# Altium PCB Mynd_USB_JACK.PcbDoc
Units mm, origin at the board's own origin, x right, y up, seen from the top; angles counter-clockwise.
Board outline 23 x 20.8 mm, 2 copper layers (Component Side, Solder Side), stack 1.58 mm thick; 39 components, 14 nets, 106 pads, 130 vias.
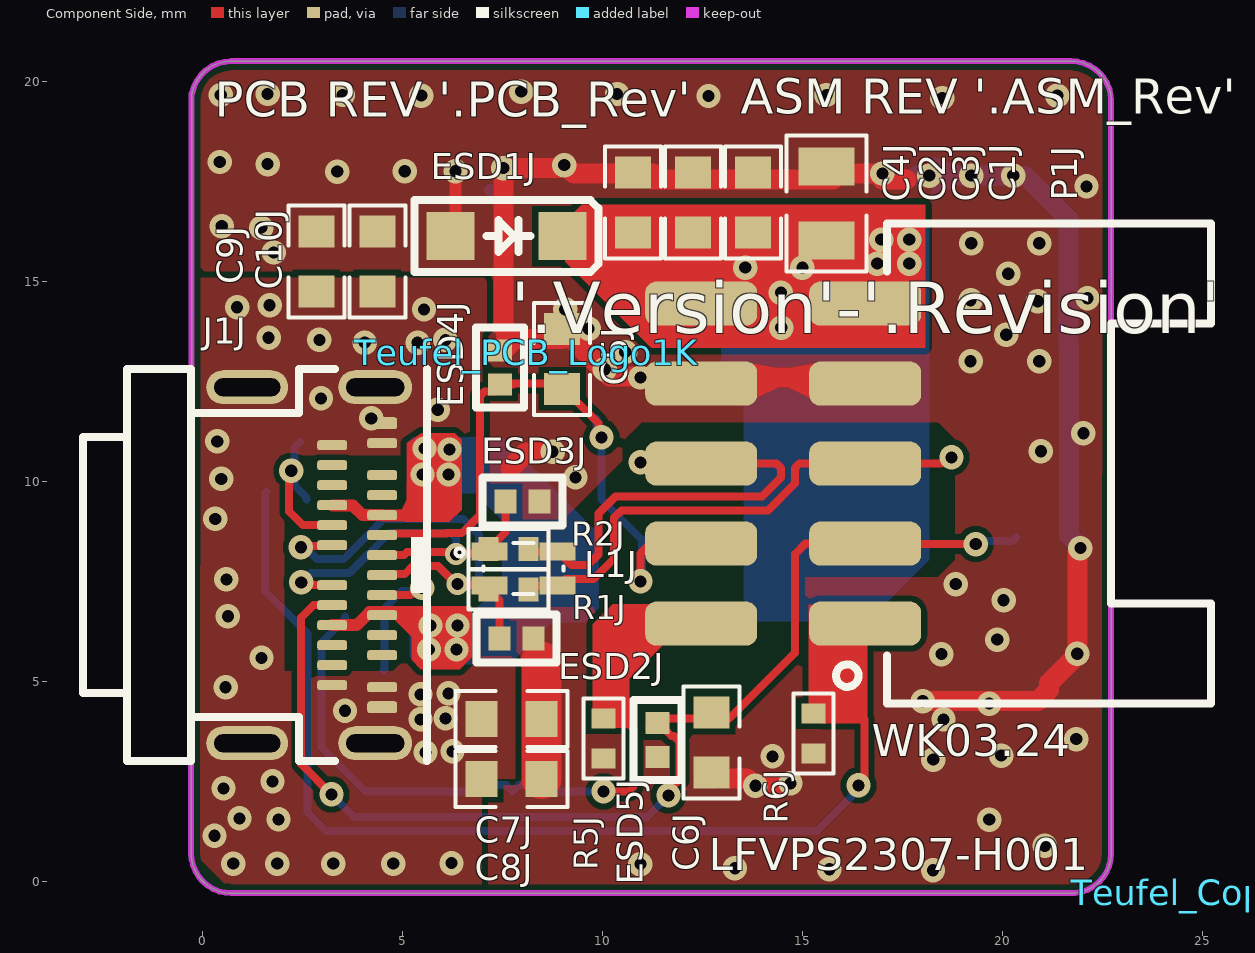
[diagram p0: Component Side view]
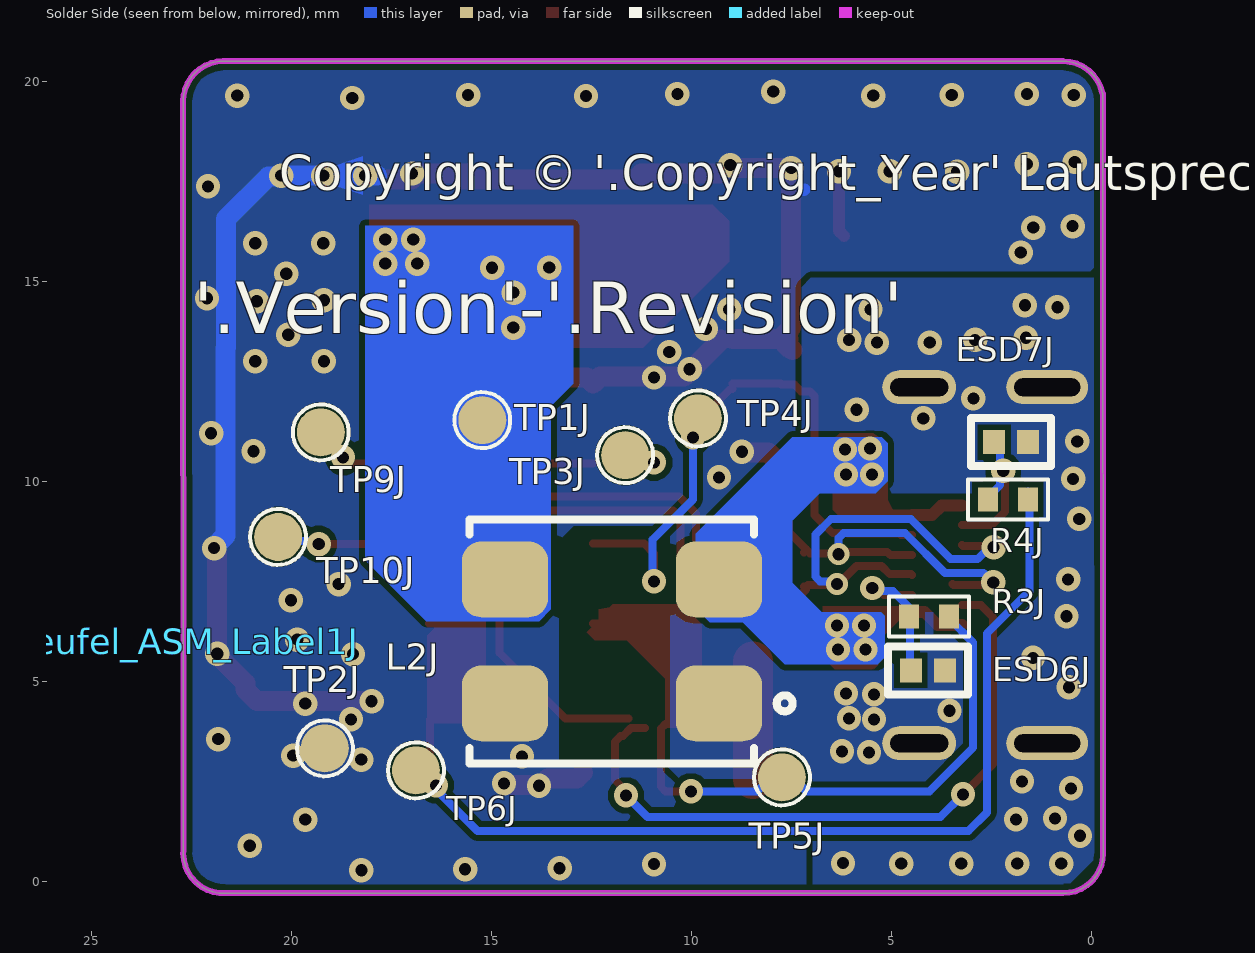
[diagram p1: Solder Side view, seen from below]
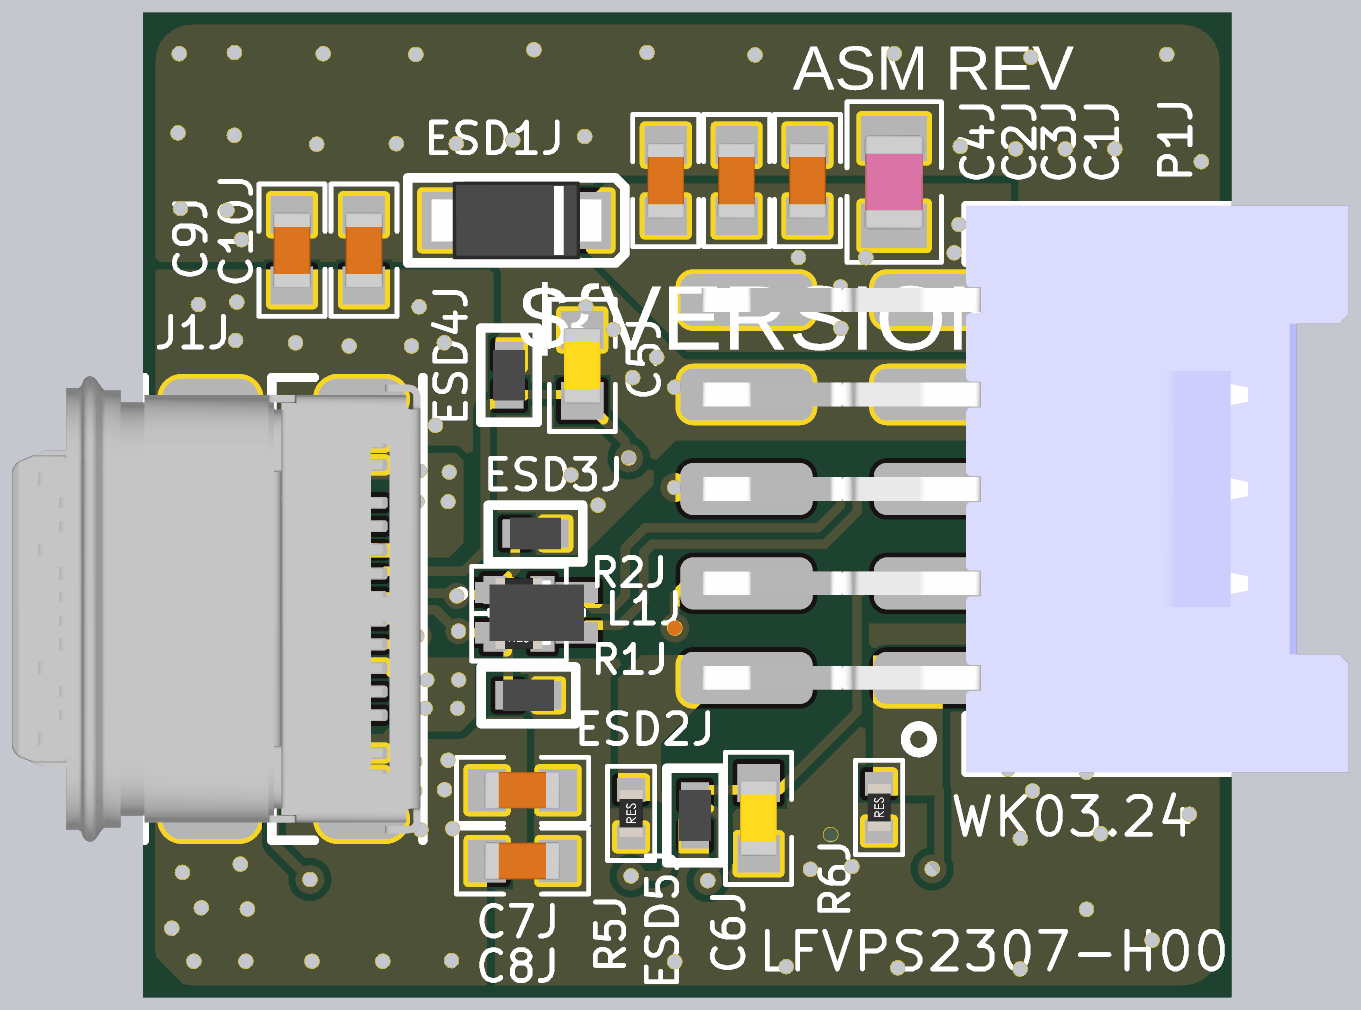
[diagram p2: 3D render of the assembled board from above, using the file's embedded part models]
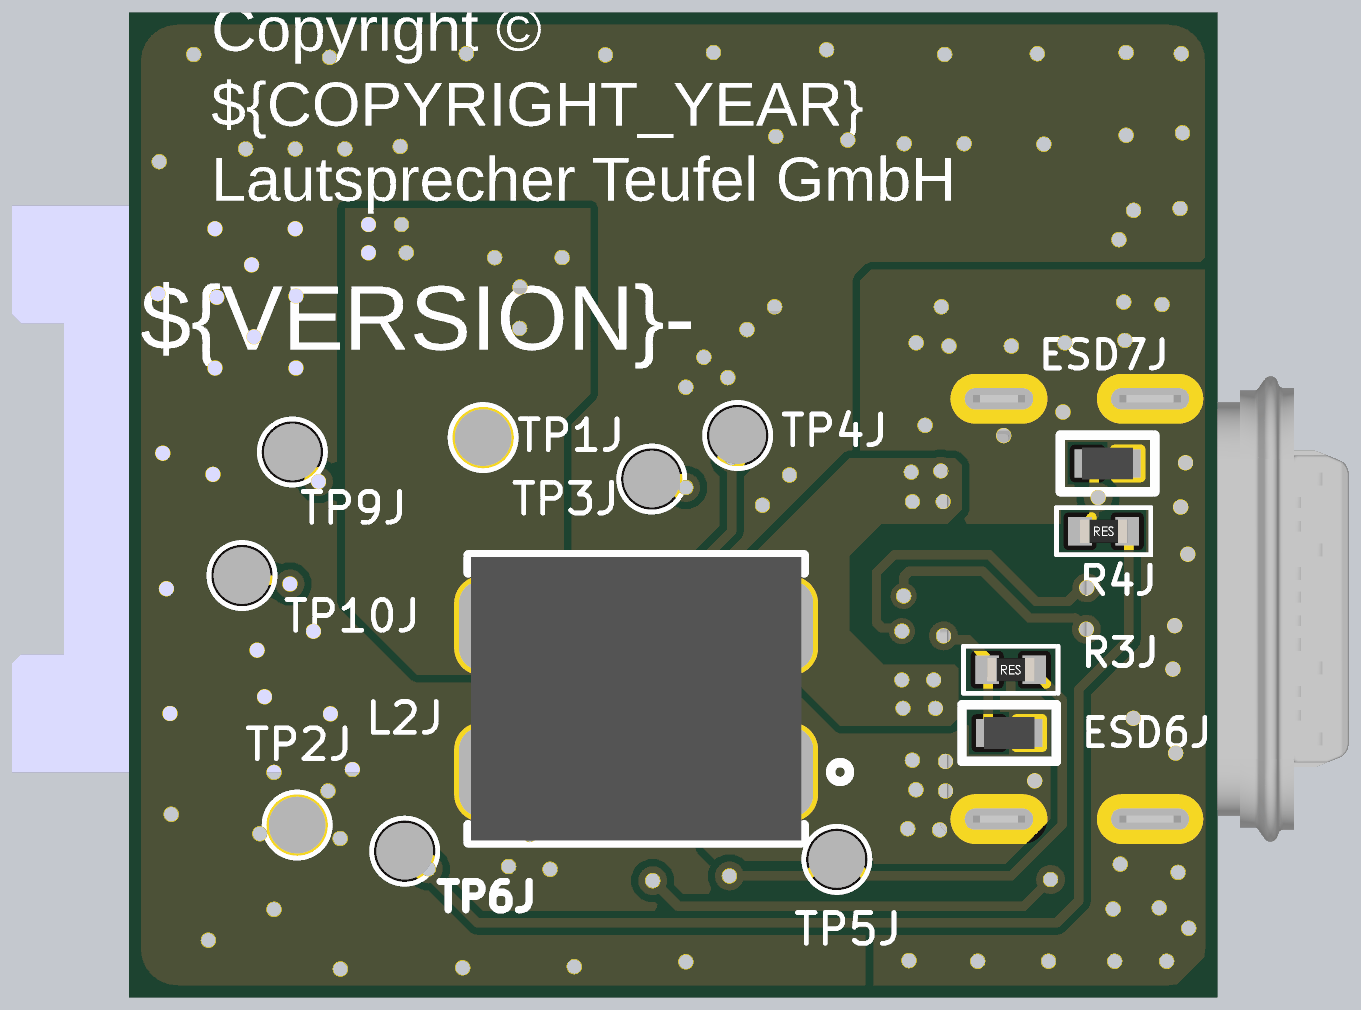
[diagram p3: 3D render of the assembled board from below, using the file's embedded part models]

## Layer stack, top to bottom
Top Solder: solder mask 0.0102, Solder Resist, Dk 3.5
Component Side: signal copper 0.035
Dielectric1: core 1.5097, FR-4, Dk 4.2
Solder Side: signal copper 0.035
Bottom Solder: solder mask 0.0102, Solder Resist, Dk 3.5

## Board outline
-0.282,0.704 -0.271,19.694 -0.264,19.694 cw(c0.718,19.504) 0.718,20.504 21.718,20.504 cw(c21.718,19.504) 22.718,19.504 22.715,0.752 22.718,0.704 cw(c21.718,0.704) 21.809,-0.292 21.791,-0.296 0.718,-0.296 cw(c0.718,0.704)

## Design rules (kind name [scope] priority, off if disabled: settings)
AssemblyTestPointUsage [HasFootprint('PAD-NDK-06')] p1:
AssemblyTestpoint [HasFootprint('PAD-NDK-06')] p1: testpointundercomponent=TRUE minsize=1.016 maxsize=2.54 preferedsize=1.524 minholesize=0 maxholesize=1.016 preferedholesize=0.813 testpointgrid=0.025 usegrid=TRUE gridtolerance=0 allowsidetop=TRUE allowsidebottom=TRUE
Clearance [All] p1: gap=0.15 ignorepadtopadclearanceinfootprint=FALSE
Clearance Clearance_Poly [InPolygon] p2 off: gap=0.25 ignorepadtopadclearanceinfootprint=FALSE // Protel DXP Scope 1 Expression Was: InPolygon
ComponentClearance ComponentClearance_Termofühler [HasFootprint('SOP65P1420X360_HS-44N') vs HasFootprint('TO-92_MCP9700')] p1 off: gap=0 collisioncheckmode=3 verticalgap=0.254 showdistances=FALSE
ComponentClearance ComponentClearance_Testpoint [InComponent('TP*')] p2 off: gap=0 collisioncheckmode=3 verticalgap=0.254 showdistances=FALSE
ComponentClearance ComponentClearance_MC16 [OnLayer('Component Side')] p3 off: gap=0 collisioncheckmode=3 verticalgap=0.254 showdistances=FALSE
ComponentClearance ComponentClearance_1 [All] p4 off: gap=0.2 collisioncheckmode=3 verticalgap=0.254 showdistances=FALSE
ComponentClearance ComponentClearance_Stiftleiste [HasFootprint('1X04RM254') vs HasFootprint('1X02RM254')] p5 off: gap=0 collisioncheckmode=3 verticalgap=0.254 showdistances=FALSE
DiffPairsRouting [All] p1 off: maxlimit=0.254 minlimit=0.254 mostfreqgap=0.254 toplayer_minwidth=0.381 toplayer_maxwidth=0.381 toplayer_prefwidth=0.381 bottomlayer_minwidth=0.381 bottomlayer_maxwidth=0.381 bottomlayer_prefwidth=0.381 maxuncoupledlength=12.7 // Protel DXP Scope 1 Expression Was: InDifferentialPairClass('USB_HS_LINES')
FabricationTestpoint [All] p1: side=3 testpointundercomponent=TRUE minsize=0.5 maxsize=2.54 preferedsize=1.524 minholesize=0 maxholesize=1.016 preferedholesize=0.813 testpointgrid=0.025 allowsidetop=TRUE allowsidebottom=TRUE usegrid=TRUE gridtolerance=0
FanoutControl Fanout_LCC [All] p1 off: bgadir=Out bgaviamode=Centered fanoutstyle=Auto fanoutdirection=Alternating viagrid=0.025 // Protel DXP Scope 1 Expression Was: IsLCC   Fanout_LCC (Default Rule)
FanoutControl Fanout_BGA [All] p2 off: bgadir=Out bgaviamode=Centered fanoutstyle=Auto fanoutdirection=Alternating viagrid=0.025 // Protel DXP Scope 1 Expression Was: IsBGA   Fanout_BGA (Default Rule)
FanoutControl Fanout_SOIC [All] p3 off: bgadir=Out bgaviamode=Centered fanoutstyle=Auto fanoutdirection=Alternating viagrid=0.025 // Protel DXP Scope 1 Expression Was: IsSOIC   Fanout_SOIC (Default Rule)
FanoutControl Fanout_Default [All] p4: bgadir=Out bgaviamode=Centered fanoutstyle=Auto fanoutdirection=Alternating viagrid=0.025 // Fanout_Default (Default Rule)
FanoutControl Fanout_Small [All] p5 off: bgadir=Out bgaviamode=Centered fanoutstyle=Auto fanoutdirection=Alternating viagrid=0.025 // Protel DXP Scope 1 Expression Was: (CompPinCount < 5)   Fanout_Small (Default Rule)
Height [All] p1 off: minheight=0 maxheight=25.4 prefheight=12.7
HoleSize [All] p1: absolutevalues=TRUE maxlimit=8 minlimit=0.25 maxpercent=80.000 minpercent=20.000
PlaneClearance [All] p1: clearance=0.3
PlaneConnect [All] p1: planeconnectstyle=Relief reliefexpansion=0.508 reliefentries=4 reliefconductorwidth=0.5 reliefairgap=0.254
PolygonConnect [All] p1: connectstyle=Direct reliefconductorwidth=0.5 reliefentries=4 polygonreliefangle="45 Angle" airgapwidth=0.254
PolygonConnect PolygonConnect_direct_stepup [All] p2 off: connectstyle=Direct reliefconductorwidth=0.254 reliefentries=4 polygonreliefangle="90 Angle" airgapwidth=0.254 // Protel DXP Scope 1 Expression Was: (InNet('NETC548_1') AND IsNamedPolygon('BOT_STEPUP_L502OUT')) OR (InNet('NetL502_1') AND IsNamedPolygon('BOT_STEPUP_L502IN')) OR     (InNet('NetC504_2') AND IsNamedPolygon('BOT_STEPUP_IN')) OR   (InNet('24V') AND IsNamedPolygon('BOT_STEPUP_24VOUT')) OR (InNet('GND') AND (IsNamedPolygon('BOT_STEPUP_GND') OR                     IsNamedPolygon('BOT_GLOBAL_GND') OR                                    IsNamedPolygon('TOP_GLOBAL_GND')                   ) )
PolygonConnect PolygonConnect_VIA [All] p3 off: connectstyle=Direct reliefconductorwidth=0.2 reliefentries=4 polygonreliefangle="90 Angle" airgapwidth=0.254 // Protel DXP Scope 1 Expression Was: isVia  or HasFootprint('HOLE_3.2_6.0') or  HasFootprint('CAPPR750W80D1600H2500') or HasFootprint('JST_B6P-VH-FB-B') or HasFootprint('JST_B2P-VH-FB-B') or HasFootprint('TE_1734366-3')
PolygonConnect PolygonConnect_direct [All] p4 off: connectstyle=Direct reliefconductorwidth=0.254 reliefentries=4 polygonreliefangle="90 Angle" airgapwidth=0.254 // Protel DXP Scope 1 Expression Was: InNet('OUT_A') or InNet('OUT_B') or InNet('OUT_C') or InNet('OUT_D') or InNet('SW1_N') or InNet('SW1_P') or InNet('SW2_N') or InNet('SW2_P') or InNet('NetC500_1') or InNet('NetC500_2') or IsNamedPolygon('BOTTOM_-5V_GND') or IsNamedPolygon('BOTTOM_5V_GND') or IsNamedPolygon('BOTTOM_3V3_GND') or IsNamedPolygon('TOP_24V') or IsNamedPolygon('BOT_5VChg_SW_Node') or ((InNet('41V')) and IsSMTPin)
PolygonConnect PolygonConnect_GND_RC_1 [All] p5 off: connectstyle=Relief reliefconductorwidth=0.5 reliefentries=4 polygonreliefangle="90 Angle" airgapwidth=0.254 // Protel DXP Scope 1 Expression Was: IsNamedPolygon('GND_RC_1')
RoutingVias [All] p1: holewidth=0.3 width=0.7 viastyle="Through Hole" minholewidth=0.25 minwidth=0.5 maxholewidth=6 maxwidth=8
ShortCircuit ShortCircuit_Antenna [InNet('ANTENNA')] p2: allowed=TRUE
SilkToSolderMaskClearance [All] p1 off: minsilkscreentomaskgap=0.254 clearancetoexposedcopper=TRUE // Protel DXP Scope 1 Expression Was: IsPad
SolderMaskExpansion [All] p1: expansion=0.102 istentingtop=FALSE
SupplyNets "Schematic Supply Nets_1" [InNet('VBUS_C')] p1: voltage=0.000
SupplyNets "Schematic Supply Nets" [InNet('GND')] p2: voltage=0.000
Width [All] p1: maxlimit=20 minlimit=0.12 preferedwidth=0.2
15 further rules are at their usual default settings.

## Classes and differential pairs
differential pair class USB_HS_LINES: D2_1 D2_2 USB_J
differential pair USB_J: +USB_J_P -USB_J_N
differential pair D2_1: +D2_1_P -D2_1_N

## Components (designator, comment, footprint, x,y, rotation, side; value= is the part's Value field where it differs from the comment)
C1J "2.2uF" C0805_145 15.596,16.942 r90 top
C2J "100nF" C0603X100 12.259,16.969 r90 top
C3J "10nF" C0603X100 13.759,16.969 r90 top
C4J "10nF" C0603X100 10.759,16.969 r90 top
C5J "470pF" C0603X80 8.992,13.056 r90 top
C6J "470pF" C0603X80 12.725,3.475 r270 top
C7J "1nF" C0603X100 7.722,4.064 r0 top
C8J "100nF" C0603X100 7.722,2.565 r0 top
C9J "1nF" C0603X100 2.845,15.494 r90 top
C10J "100nF" C0603X100 4.369,15.494 r90 top
ESD1J "SMF26AL" SOD-123FL 7.595,16.129 r180 top
ESD2J "CESD0501CU" DFN2_100X60X50_65 7.85,6.075 r180 top
ESD3J "CESD0501CU" DFN2_100X60X50_65 8,9.5 r180 top
ESD4J "CESD0501CU" DFN2_100X60X50_65 7.442,12.852 r90 top
ESD5J "CESD0501CU" DFN2_100X60X50_65 11.379,3.53 r270 top
ESD6J "CESD0501CU" DFN2_100X60X50_65 4.1,5.275 r0 bottom
ESD7J "CESD0501CU" DFN2_100X60X50_65 2.018,10.984 r0 bottom
J1J "NG-HC-0412" USB_TYPE_C_HC_0768 1.118,7.904 r270 top locked
L1J "90R" CET2012D 8.025,7.825 r0 top
L2J "700R" DU_IND_SMD_SCM7060 12,6 r0 bottom
P1J "WB200AW-10" WB200AW_2x5P 14.517,10.444 r90 top locked
R1J "0R" R0402 7.65,7.3 r0 top
R2J "0R" R0402 7.65,8.306 r0 top
R3J "0R" R0402 4.068,6.616 r180 bottom
R4J "0R" R0402 2.101,9.549 r180 bottom
R5J "NC" R0402 10.025,3.575 r90 top
R6J "NC" R0402 15.275,3.7 r90 top
Teufel_ASM_Label1J "3.2" Teufel_ASM_Rev 22.65,6 r180 bottom
Teufel_Copyright1K "2023" TEUFEL_COPYRIGHT 26,-0.275 r90 top
Teufel_PCB_Label1J "3.2" Teufel_PCB_Rev -8.233,15.804 r0 top
Teufel_PCB_Logo1K "T.3.0.0040-3.2" Teufel_NoLogo 8.1,13.225 r0 top (schematic designator Teufel_PCB_Logo1k)
TP1J "TP12" TP120 15.24,11.532 r90 bottom
TP2J "TP12" TP120 19.177,3.327 r90 bottom
TP3J "TP12" TP120 11.668,10.654 r90 bottom
TP4J "TP12" TP120 9.85,11.575 r90 bottom
TP5J "TP12" TP120 7.75,2.6 r90 bottom
TP6J "TP12" TP120 16.9,2.775 r90 bottom
TP9J "TP12" TP120 19.279,11.227 r90 bottom
TP10J "TP12" TP120 20.345,8.611 r90 bottom

## Footprints (in the part's own frame and the unit in brackets; to place one, negate y for a bottom-side part, rotate by r counter-clockwise, add the part's x,y. Pads: shape width x height; smd on the part's side, far side on the other; paste and mask are expansions set on the pad)
C0603X80 [mm] "MLCC CAP 0603 T= 0.8 mm"
  rect 0.8x0.9 smd: 1(-0.745,0) 2(0.755,0)
  silkscreen extent -1.4,-0.7 1.4,0.7, body extent -0.8,-0.4 0.8,0.4, height 0.5
C0603X100 [mm] "MLCC CAP 0603 T= 1.0 mm"
  rect 0.8x0.9 smd: 1(-0.745,0) 2(0.755,0)
  silkscreen extent -1.4,-0.7 1.4,0.7, body extent -0.8,-0.4 0.8,0.4, height 0.8
C0805_145 [mm] "Chip Capacitor 0805, T= 1.45 mm"
  rect 0.95x1.4 smd: 1(-0.925,0) 2(0.925,0)
  silkscreen extent -1.7,-1 1.7,1, body extent -1,-0.62 1,0.63, height 1.45
CET2012D [mm] "CET2012D 2x1.2x1.2mm"
  rect 0.9x0.45 smd: 1(-0.85,0.425) 2(-0.85,-0.425) 3(0.85,-0.425) 4(0.85,0.425)
  silkscreen extent -1.7,-0.64 1,0.64, body extent -1,-0.6 1,0.6, height 1.2
DFN2_100X60X50_65 [mm] "DFN, 2-Leads, Body 1.00 x 0.60 mm, Pitch 0.65mm, IPC Medium Density"
  rect 0.55x0.6 smd: 1(-0.425,0) 2(0.425,0)
  silkscreen extent -1,-0.6 1,0.6, body extent -0.54,-0.34 0.54,0.34, height 0.5
DU_IND_SMD_SCM7060 [mm] "COM inductors TSA: SCM7060 L= 7.0 W= 6.0 H= 3.8 mm"
  rrect50% 2.15x1.9 smd: 1(-2.675,1.55) 2(-2.675,-1.55) 3(2.675,-1.55) 4(2.675,1.55)
  Component Side pour cut-out: -0.7,-2.3 0.7,-2.3 0.7,2.3 -0.7,2.3
  silkscreen extent -4.52,-3.05 3.56,3.05, body extent -3.5,-3 3.5,3, height 3.8
R0402 [mm] "Chip Resistor 0402"
  rect 0.5x0.6 smd: 1(-0.5,0) 2(0.5,0)
  silkscreen extent -1,-0.5 1,0.5, body extent -0.5,-0.25 0.5,0.25, height 0.3
SOD-123FL [mm] "2 terminals;  2.675 mm x 1.6 mm x 1.15 mm body"
  rect 1.2x1.2 smd: A(1.4,0) K(-1.4,0)
  silkscreen extent -2.3,-0.9 2.3,0.9, body extent -1.8,-0.82 1.8,0.83, height 0.95
Teufel_ASM_Rev [mm]
TEUFEL_COPYRIGHT [mm]
Teufel_NoLogo [mm] "Teufel NoLogo"
Teufel_PCB_Rev [mm]
TP120 [mm] "TEST PAD 1.2mm"
  round 1.2 smd: 1(0,0)
  silkscreen extent -0.7,-0.7 0.7,0.7
USB_TYPE_C_HC_0768 [mm] "USB_TYPE _C JAC: Fantesi HC_0768"
  rrect50% 0.25x0.75 smd: A1(-3.05,3.375) A2(-2.25,3.375) A3(-1.75,3.375) A4(-1.25,3.375) A5(-0.75,3.375) A6(-0.25,3.375) A7(0.25,3.375) A8(0.75,3.375) A9(1.25,3.375) A10(1.75,3.375) A11(2.25,3.375) A12(3.05,3.375) B1(3,2.125) B2(2.5,2.125) B3(2,2.125) B4(1.5,2.125) B5(1,2.125) B6(0.5,2.125) B7(-0.5,2.125) B8(-1,2.125) B9(-1.5,2.125) B10(-2,2.125) B11(-2.5,2.125) B12(-3,2.125)
  oval 0.85x2.05 hole 0.45 slot 1.65 at 90 deg: G1(-4.45,0) G2(4.45,0)
  oval 0.85x2.05 on Top Paste: G1(-4.45,0) G2(4.45,0)
  rrect50% 0.3x0.75 smd: G1(-3.55,3.375) G2(3.55,3.375)
  oval 0.85x1.85 hole 0.45 slot 1.45 at 90 deg: G3(-4.45,3.2) G4(4.45,3.2)
  oval 0.85x1.85 on Top Paste: G3(-4.45,3.2) G4(4.45,3.2)
  silkscreen extent -4.9,-4.1 4.9,4.6, body extent -4.92,-4.2 4.92,4.45, height 3.53
WB200AW_2x5P [mm] "WB200AW 2x5 Pin, 2.0 Pitch AÐÍË«ÅÅÎÔÌùWTB"
  rrect50% 1.1x2.8 smd: 1(-4,-2.05) 2(-4,2.05) 3(-2,-2.05) 4(-2,2.05) 5(0,-2.05) 6(0,2.05) 7(2,-2.05) 8(2,2.05) 9(4,-2.05) 10(4,2.05)
  silkscreen extent -6,-10.7 6,-1.32, body extent -6,-10.7 6,3, height 8.11

## Part data
C1J: library part P-001-0127-42, "GPHF $ SMD M CAP 2.2uF 50V ±10% 0805 X5R", Manufacturer=Multi-Sourced, TemperatureRange=X5R, Tolerance=±10%, Voltage=50V, Part_Number=Generic, Part_Type="Capacitor ceramic SMT"
C2J C8J C10J: library part P-001-0074-64, "GPHF SMD M CAP 100nF 50V ±10% 0603 X7R", Manufacturer=Multi-Sourced, TemperatureRange=X7R, Tolerance=±10%, Voltage=50V, Part_Number=Generic, Part_Type="Capacitor ceramic SMT"
C3J C4J: library part P-001-0058-45, "PSHF SMD M CAP 10nF 50V ±10% 0603 X7R", Manufacturer=Multi-Sourced, TemperatureRange=X7R, Tolerance=±10%, Voltage=50V, Part_Number=Generic, Part_Type="Capacitor ceramic SMT"
C5J C6J: library part P-001-0647-8, "PSHF SMD CAP 470pF 50V 10%", Manufacturer=Multi-Sourced, TemperatureRange=X7R, Tolerance=±10%, Voltage=50V, Part_Number=Generic, Part_Type="Capacitor ceramic SMT"
C7J C9J: library part P-001-0073-51, "GPHF SMD M CAP 1nF 50V ±10% 0603 X7R", Manufacturer=Multi-Sourced, TemperatureRange=X7R, Tolerance=±10%, Voltage=50V, Part_Number=Generic, Part_Type="Capacitor ceramic SMT"
ESD1J: library part R-001-1700-2, "SMD TVS 2P 26 SOD-123FL SMF26AL JJW", Current=1A, Manufacturer=JJW, Voltage=26, Part_Number=SMF26AL, Part_Type="Semiconductor Diode TVS SMT"
ESD2J ESD3J ESD4J ESD5J ESD6J ESD7J: library part R-001-1582-2, "SMD TVS 2P 5.5 DFN1006 CESD0501CU CTE", Manufacturer=CTE, Voltage=5.5V, Part_Number=CESD0501CU, Part_Type="Semiconductor Diode TVS SMT"
J1J: library part C-001-0947-5, "SMD USB JACK 24P TID VERIFY", Manufacturer=FTS, Part_Number=NG-HC-0412, Part_Type="Jack USBC SMT"
L1J: library part S-001-0426-3, "COMMON MODE COIL 90Ohm 100MHz 400mA", Current=400mA, Frequency=100MHz, Manufacturer="CET CHAMPI", Part_Number=CET2012A-900S, Part_Type="Ferrite Bead SMT"
L2J: library part S-001-0352-17, "GPCOMMON MODE COIL 700Ohm 100MHz 125V 4A", Current=4A, Frequency=100MHz, Manufacturer="CET CHAMPI", Voltage=125V, Part_Number=CET706038-701T02, Part_Type="Inductor common Mode SMT"
P1J: library part C-001-1113-2, "SMD WTB CONNECTOR 10P P2.0mm TIN", Manufacturer=MINGHENG, Part_Number=WB200AW-10, Part_Type="Connector WTB SMT", System=Connector
R1J R2J R5J R6J: library part Q-001-0802-8, "SMD THICK FILM RES. 0Ohm 1/16W 1% 0402", Manufacturer=Multi-Sourced, Tolerance=1%, Part_Number=Generic, Part_Type="Resistor SMT", Wattage=1/16W
R3J R4J: library part Q-001-0330-113, "GPHF SMD RES. 0OHM 1/16W 5% 0402", Manufacturer=Multi-Sourced, Tolerance=5%, Part_Number=Generic, Part_Type="Resistor SMT", Wattage=1/16W
Teufel_ASM_Label1J: library part CMP-00088-3, "Teufel_ASM_Rev"
Teufel_Copyright1K: library part CMP-00086-3, "Teufel_Copyright_Year"
Teufel_PCB_Label1J: library part CMP-00087-3, "Teufel_PCB_Label"
Teufel_PCB_Logo1K: library part "Teufel NoLogo", "Teufel PCB NoLogo"
TP1J TP2J TP3J TP4J TP5J TP6J TP9J TP10J: library part N-001-00010-2, "Test Point", Design Item ID=TP

## Via types
v1: diameter 0.61, hole 0.305, Component Side to Solder Side, tented both sides, 120 vias
v2: diameter 0.6, hole 0.3, Component Side to Solder Side, tented both sides, 8 vias
v3: diameter 0.55, hole 0.305, Component Side to Solder Side, tented both sides, 2 vias

## Nets (pads, with @x,y where several pads share a name; then routed paths per layer and width w, separated by ;. In a path a pad name is that pad's centre, name@x,y a point inside that pad or via, vN(x,y) a via of type N, cw(c..) or ccw(c..) an arc to the next point about the centre after c; other vN are vias at no path point)
D2_1_N: ESD2J.2 J1J.A7 J1J.B7 L1J.2 R1J.1 | length 12
  Component Side w0.2: v1(2.458,8.351) 2.485,8.379 3.218,8.379 J1J.B7 ; J1J.A7 4.518,7.679 5.053,7.679 5.263,7.888 5.884,7.888 6.339,7.433 v3(6.372,7.433) 6.401,7.404 7.096,7.404 7.163,7.338 R1J.1@7.2,7.375 ; R1J.1 7.425,7.025 ESD2J.2
  Solder Side w0.2: v1(2.458,8.351) 2.565,8.351 2.855,8.061 3.53,8.061 4.523,9.054 6.528,9.054 6.91,8.672 6.91,7.617 6.793,7.5 6.439,7.5 v3(6.372,7.433)
D2_1_P: ESD3J.2 J1J.A6 J1J.B6 L1J.1 R2J.1 | length 10.2
  Component Side w0.2: v1@2.418,7.524 v1(2.468,7.474) 2.538,7.404 J1J.B6 3.459,7.404 J1J.B6@3.484,7.429 ; J1J.A6 5.033,8.154 5.118,8.238 6.276,8.238 v3(6.336,8.179) 6.359,8.202 7.046,8.202 R2J.1 7.575,8.731 ESD3J.2 ; R2J.1@7.135,8.29 R2J.1@7.2,8.225
  Solder Side w0.2: v1(2.468,7.474) 2.708,7.714 2.71,7.711 3.675,7.711 4.668,8.704 6.214,8.704 6.331,8.586 6.331,8.184 v3(6.336,8.179)
GND: C1J.2 C2J.2 C3J.2 C4J.2 C5J.2 C6J.2 C7J.2 C8J.2 C9J.2 C10J.2 ESD1J.A ESD2J.1 ESD3J.1 ESD4J.2 ESD5J.2 L2J.4 P1J.7 P1J.8 R5J.1 R6J.1 TP2J.1 | length 52
  Component Side w0.3: ESD1J.A 6.325,16.259 v1(6.325,17.755)
  Component Side w0.5: ESD4J.2@7.492,13.281 7.517,13.306 7.542,13.306 ESD4J.2@7.692,13.456 ; 7.592,13.556 C5J.2@8.992,13.556 ; 7.696,10.331 8.083,10.718 8.731,10.718 v1(8.752,10.739) ; 7.767,13.594 7.518,13.843 v1(7.518,17.831) 8.937,17.831 9.013,17.907 9.072,17.907 9.281,17.699 11.267,17.699 ; C5J.2@9.267,13.544 10.193,12.618 12.293,12.618 P1J.8 12.617,12.594 16.417,12.594 P1J.7 ; 11.267,17.544 C1J.2@15.767,17.544 ; C6J.2 12.875,2.57 13.613,2.57 13.793,2.391 v1(13.822,2.391) 13.843,2.412 14.632,2.412 14.67,2.45 v1(14.7,2.45) ; C1J.2@15.596,17.697 v1(16.996,17.697) ; v1@16.996,17.542 17.596,17.542 ; v1(18.007,4.504) 20.874,4.504 21.167,4.796 21.167,4.958 21.869,5.66 21.869,8.225 21.946,8.302 v1(21.946,8.331)
  Component Side w1: 8.468,5.493 8.477,5.484 C7J.2 ; C7J.2@8.472,4.089 8.472,2.57 C8J.2
  Solder Side w0.3: 7.188,17.294 7.193,17.289
  Solder Side w0.5: v1@17.867,17.644 v1(18.167,17.644) v1(19.217,17.644) v1(20.267,17.644) 20.288,17.623 20.588,17.623 21.647,16.565 21.647,13.344 21.665,13.325 21.665,8.642 21.946,8.361 v1(21.946,8.331)
  other v1: 18.263,0.279 15.672,0.305 13.31,0.33 10.947,0.432 21.057,0.889 19.667,1.544 18.267,3.044 14.25,3.125 19.967,3.144 21.844,3.556 18.525,4.05 19.667,4.444 18.473,5.682 21.869,5.69 19.867,6.044 20.026,7.031 18.833,7.431 9.325,10.1 20.96,10.754 22.022,11.201 10.947,12.598 10.058,12.802 19.202,13.005 20.918,13.004 10.566,13.233 20.091,13.665 9.652,13.818 9.068,14.3 20.879,14.503 19.202,14.529 22.123,14.58 20.142,15.189 1.778,15.723 19.218,15.954 20.918,15.954 1.467,16.344 0.483,16.383 22.098,17.374 3.367,17.744 5.055,17.755 9.042,17.907 1.626,17.932 0.432,17.983 18.491,19.583 12.649,19.634 0.457,19.66 3.505,19.66 5.467,19.644 15.596,19.66 21.367,19.644 1.626,19.685 10.363,19.685 7.967,19.744
NetC7J_1: C7J.1 C8J.1 C9J.1 C10J.1 ESD6J.1 ESD7J.1 J1J.A1 J1J.A12 J1J.B1 J1J.B12 J1J.G1@1.118,12.354 J1J.G1@4.493,11.454 J1J.G2@1.118,3.454 J1J.G2@4.493,4.354 J1J.G3@4.318,12.354 J1J.G4@4.318,3.454 L2J.1
  other v1: 0.767,0.444 1.867,0.444 3.267,0.444 4.767,0.444 6.223,0.457 0.3,1.143 1.9,1.55 0.925,1.575 0.525,2.325 1.75,2.5 5.575,3.225 6.25,3.25 5.45,4.05 6.075,4.075 3.561,4.264 5.45,4.675 6.15,4.7 0.576,4.852 1.473,5.588 0.635,6.629 0.597,7.549 0.319,9.063 0.47,10.062 0.367,10.999 4.218,11.574 5.882,11.791 2.963,12.074 4.056,13.47 5.376,13.47 2.921,13.538 6.071,13.538 1.651,13.589 5.537,14.3 0.864,14.351 1.676,14.402
NetESD6J_2: ESD6J.2 J1J.A8 R3J.1 | length 3.8
  Component Side w0.2: J1J.A8 5.202,7.154 5.382,7.333 v1(5.493,7.333)
  Solder Side w0.2: R3J.1@4.418,6.749 4.468,6.749 4.974,7.255 5.414,7.255 v1(5.493,7.333) ; ESD6J.2 4.546,5.296 4.546,6.595 R3J.1
NetESD7J_2: ESD7J.2 J1J.B8 R4J.1 | length 3.9
  Component Side w0.2: v1(2.218,10.264) 2.168,10.214 2.168,9.249 2.513,8.904 J1J.B8
  Solder Side w0.2: ESD7J.2 2.296,10.837 2.296,10.342 v1(2.218,10.264) 2.296,10.185 2.296,9.903 2.601,9.599 R4J.1
NetJ1J_A4: J1J.A4 J1J.A9 J1J.B4 J1J.B9 L2J.2 | length 6.8
  Component Side w0.3: J1J.B4 3.855,6.404 4.18,6.729 4.493,6.729 J1J.A9@4.773,6.729 ; J1J.B9@3.248,9.398 3.759,9.398 4.004,9.154 J1J.A4 4.502,9.144 5.024,9.144 5.5,9.62 v2(5.5,10.175) ; J1J.A9@4.798,6.729 5.521,6.729 5.7,6.55 5.7,6.325 5.9,6.525 6.175,6.525 v2@6.375,6.325
  other v2: 5.664,5.8 6.35,5.8 5.7,6.4 6.375,6.4 6.15,10.175 6.175,10.8 5.55,10.825
USB-CC1: C5J.1 ESD4J.1 J1J.A5 P1J.4 TP4J.1 | length 16.6
  Component Side w0.2: J1J.A5 4.773,8.654 4.818,8.699 6.094,8.699 6.099,8.704 6.479,8.704 6.934,9.159 6.934,12.135 7.051,12.252 7.276,12.252 7.442,12.419 7.767,12.419 ; 7.767,12.444 C5J.1@8.992,12.444 ; C5J.1 9.042,12.311 9.897,11.456 9.897,11.178 v1(9.975,11.1) ; v1(10.95,7.5) 10.95,8.2 11.194,8.444 P1J.4
  Solder Side w0.2: TP4J.1 9.85,10.975 v1(9.975,11.1) 9.975,9.55 10.982,8.543 10.982,7.532 v1(10.95,7.5)
USB-CC2: C6J.1 ESD5J.1 J1J.B5 P1J.3 TP10J.1 | length 29.1
  Component Side w0.2: J1J.B5 3.241,6.905 2.774,6.905 2.468,6.599 2.468,2.932 v1(3.225,2.175) v1@3.33,2.175 ; ESD5J.1@11.179,3.833 11.526,3.833 11.729,3.63 11.783,3.63 11.929,3.483 11.929,2.54 11.65,2.261 v1(11.65,2.15) ; ESD5J.1@11.582,4.072 13.166,4.072 14.808,5.715 14.808,8.179 15.073,8.444 P1J.3 16.573,8.438 19.324,8.438 v1(19.329,8.433)
  Solder Side w0.2: v1(3.225,2.175) 3.792,1.608 11.108,1.608 v1(11.65,2.15) ; v1(19.329,8.433) 19.408,8.511 20.246,8.511 TP10J.1
USB_J_N: L1J.3 P1J.5 R1J.2 TP9J.1 | length 12.3
  Component Side w0.2: R1J.2@8.352,7.379 8.902,7.379 9.08,7.556 9.082,7.554 9.774,7.554 10.291,8.071 10.291,9.094 10.472,9.275 14.133,9.275 14.809,9.951 14.809,10.332 14.92,10.444 P1J.5 18.458,10.444 v1@18.518,10.504
  other v1: 18.725,10.6
USB_J_P: L1J.4 P1J.6 R2J.2 TP3J.1 | length 10
  Component Side w0.2: R2J.2@8.352,8.229 8.902,8.229 9.227,7.904 9.629,7.904 9.9,8.175 9.9,9.198 10.327,9.625 13.988,9.625 14.459,10.096 14.459,10.332 14.348,10.444 P1J.6
  other v1: 10.95,10.475
USB_SBU1: P1J.2 R3J.2 R5J.2 TP5J.1 | length 18.7
  Component Side w0.2: v1(10.025,2.25) 10.662,2.25 10.779,2.367 10.779,3.816 10.662,3.934 10.166,3.934 R5J.2 ; R5J.2@10.039,4.075 10.039,5.65 10.833,6.444 P1J.2
  Solder Side w0.2: R3J.2 3.568,6.566 2.975,5.974 2.975,3.342 4.067,2.25 7.133,2.25 7.29,2.407 7.593,2.407 7.75,2.25 7.907,2.407 8.21,2.407 8.367,2.25 v1(10.025,2.25)
USB_SBU2: P1J.1 R4J.2 R6J.2 TP6J.1 | length 29.1
  Component Side w0.2: R6J.2@15.225,4.2 R6J.2 ; v1(16.4,2.4) 16.55,2.55 16.55,4.05 16.4,4.2 R6J.2 ; P1J.1 15.812,6.444 15.275,5.906 R6J.2
  Solder Side w0.2: R4J.2@1.601,9.749 1.567,9.715 1.567,7.259 2.625,6.202 2.625,1.725 3.092,1.258 15.358,1.258 v1@16.325,2.225
VBUS_C: C1J.1 C2J.1 C3J.1 C4J.1 ESD1J.K L2J.3 P1J.9 P1J.10 TP1J.1 | length 23.2
  Component Side w0.6: P1J.10@11.429,14.598 11.429,14.632 11.367,14.694 11.059,14.694 10.77,14.983 10.77,15.028 11.383,15.028 11.573,14.838 11.967,14.444 P1J.10 12.619,14.595 13.584,14.595 13.584,14.589 13.567,14.589 13.4,14.421 P1J.10@13.4,14.411 ; 11.429,15.044 11.429,15.203 11.567,15.341 11.567,15.344 12.467,15.344 12.835,15.344 ; P1J.10@13.451,14.727 12.835,15.344 ; P1J.10@13.566,14.842 13.566,15.342 v1(13.567,15.344) ; v1@13.667,15.344 14.367,15.344 14.469,15.242 v1@15.168,15.242 ; v1@14.996,15.34 C1J.1@15.649,15.993 ; 15.167,15.044 15.656,15.044 16.917,15.044 ; C1J.1@15.821,15.995 16.021,15.995 16.225,16.198 16.81,16.198 16.965,16.044 v1(16.967,16.044) ; P1J.9@16.492,14.569 15.842,14.569 15.117,13.844 v1(14.467,13.844) 14.467,13.846 14.461,13.853 14.461,14.718 v1(14.459,14.72) 14.456,14.72 13.916,15.26 13.484,15.26 13.4,15.344 12.835,15.344 ; v1(16.867,15.444) 16.869,15.445 16.869,15.943 16.967,16.041 v1(16.967,16.044) ; 17.593,13.844 16.767,14.669 16.893,14.669 16.917,14.694 16.917,15.044 ; v1(17.667,15.444) 17.665,15.444 17.265,15.044 16.917,15.044 ; 16.917,15.044 16.917,15.394 17.015,15.394 17.665,16.044 v1(17.667,16.044) v1(16.967,16.044)
  other v1: 14.996,15.342
pads on no net: J1J.A2 J1J.A3 J1J.A10 J1J.A11 J1J.B2 J1J.B3 J1J.B10 J1J.B11 J1J.G1@1.118,12.354 J1J.G2@1.118,3.454 J1J.G3@4.318,12.354 J1J.G4@4.318,3.454

## Polygon pours and split planes (outlines as drawn)
NetC7J_1 on Component Side "NONET_L-01_P-001" (solid, remove dead copper, pour order 6): -0.274,15.088 7.027,15.088 7.256,14.859 7.256,7.645 7.518,7.383 10.44,7.383 11.269,6.553 11.269,3.53 10.305,2.565 6.977,2.565 6.977,-0.198 6.918,-0.256 0.753,-0.256 -0.274,0.771
GND on Component Side "NONET_L-01_P-001" (solid, remove dead copper, pour order 4): 0.723,20.702 21.723,20.702 cw(c21.723,19.702) 22.723,19.702 22.723,0.828 cw(c21.796,0.828) 21.796,-0.098 0.723,-0.098 cw(c0.723,0.902) -0.277,0.902 -0.277,19.702 cw(c0.723,19.702) 0.723,20.702
GND on Solder Side "NONET_L-01_P-001" (solid, remove dead copper, pour order 5): 0.718,20.504 21.718,20.504 cw(c21.718,19.504) 22.718,19.504 22.718,0.63 cw(c21.791,0.63) 21.791,-0.296 0.718,-0.296 cw(c0.718,0.704) -0.282,0.704 -0.282,19.504 cw(c0.718,19.504) 0.718,20.504
NetC7J_1 on Solder Side "NONET_L-01_P-001" (solid, remove dead copper, pour order 2): -0.274,15.088 7.027,15.088 7.256,14.859 7.256,7.645 7.518,7.383 10.44,7.383 11.269,6.553 11.269,3.53 10.305,2.565 6.977,2.565 6.977,-0.198 6.918,-0.256 0.753,-0.256 -0.274,0.771

## Keep-outs
Keep-Out Layer:
  lines w0.013: 0.718,20.504 6.703,20.504 ; 22.718,0.704 22.718,1.294
  lines w0.15: -0.271,19.694 -0.282,0.704 ccw(c0.718,0.704) 0.718,-0.296 15.857,-0.296 21.791,-0.296 ; -0.264,19.694 cw(c0.718,19.504) 0.718,20.504 21.718,20.504 cw(c21.718,19.504) 22.718,19.504 22.715,0.752 ; 21.809,-0.292 ccw(c21.718,0.704) 22.718,0.704

## Other copper
Component Side:
  pour cut-out: 2.049,10.649 4.946,10.649 4.946,5.449 4.755,5.258 2.049,5.258
  region net USB_SBU1: 12.05,6.85 11.975,6.925 10.25,6.925 9.75,6.425 9.75,3.95 9.825,3.875 9.85,3.9 10.491,3.9 10.525,3.934 10.662,3.934 10.662,5.062 11.625,6.025 12.425,6.025 12.625,6.225 12.325,6.525 12.325,6.8
  region net USB_SBU2: 15.15,4.272 15.472,3.95 16.622,3.95 16.622,6.153 15.861,6.914 15.15,6.914
  pour cut-out: 8,9.05 9.025,9.05 10.495,10.52 10.495,10.995 10.975,11.475 18.395,11.475 18.815,11.055 18.815,8.04 18.375,7.6 10.625,7.6 9.875,6.85 7.75,6.85 7.75,8.8
  pour cut-out: 8.444,8.9 8.55,8.794 8.55,8.756
  region net NetJ1J_A4: 5.461,5.334 5.486,5.309 6.426,5.309 6.725,5.607 6.725,6.875 5.099,6.875 4.952,6.729 4.773,6.729 4.773,6.581 5.232,6.121 5.232,5.537 5.461,5.309
  region net NetJ1J_A4: 4.913,9.149 5.105,9.536 5.105,10.959 5.468,11.206 6.308,11.206 6.475,11.04 6.475,9.294 6.172,8.992 5.07,8.992
  region net VBUS_C: 9.474,16.916 18.067,16.916 18.067,13.344 11.218,13.344 9.067,15.494 9.067,16.51
Solder Side:
  pour cut-out: 6.8,9.7 2.474,9.7 1.773,8.999 1.773,7.177 2.221,6.729 6.554,6.729 7.25,7.425 7.225,7.45 7.225,9.275
  region net NetJ1J_A4: 5.375,11.1 7.487,11.1 9.437,9.15 9.9,8.687 9.9,6.825 9.55,6.475 8.725,6.475 7.675,5.425 5.35,5.425 5.175,5.6 5.175,6.636 5.268,6.729 6.754,6.729 7.487,7.462 7.487,9.013 6.8,9.7 5.4,9.7 5.1,10 5.1,10.95 5.25,11.1
  pour cut-out: 10.541,8.89 10.541,2.952 13.335,2.952 13.335,8.509 12.954,8.89
  region net VBUS_C: 13.528,11.883 12.967,12.444 12.967,16.394 18.167,16.394 18.167,8.033 16.638,6.504 13.823,6.504 13.528,6.799

## Silkscreen, mask and mechanical layers (free items; w line width, h text height)
Top Overlay:
  text "WK03.24" at 16.725,3.125 h0.8
  text "LFVPS2307-H001" at 12.65,0.275 h0.8
Mechanical 1:
  lines w0.013: 0.718,20.504 6.703,20.504 ; 22.718,0.704 22.718,1.294 ; 0.593,3.229 cw(c0.593,3.454) 0.593,3.679 1.643,3.679 cw(c1.643,3.454) 1.643,3.229 0.593,3.229 ; 0.593,12.129 cw(c0.593,12.354) 0.593,12.579 1.643,12.579 cw(c1.643,12.354) 1.643,12.129 0.593,12.129 ; 3.893,3.229 cw(c3.893,3.454) 3.893,3.679 4.743,3.679 cw(c4.743,3.454) 4.743,3.229 3.893,3.229 ; 3.893,12.129 cw(c3.893,12.354) 3.893,12.579 4.743,12.579 cw(c4.743,12.354) 4.743,12.129 3.893,12.129
  lines w0.15: -0.271,19.694 -0.282,0.704 ccw(c0.718,0.704) 0.718,-0.296 15.857,-0.296 21.791,-0.296 ; -0.264,19.694 cw(c0.718,19.504) 0.718,20.504 21.718,20.504 cw(c21.718,19.504) 22.718,19.504 22.715,0.752 ; 21.809,-0.292 ccw(c21.718,0.704) 22.718,0.704
Mechanical 2:
  drawing of 7089 lines, arcs and shapes, not listed
Top Assembly:
  drawing of 359 lines, arcs and shapes, not listed

## Text inside footprints (layer, text, board x,y; h text height)
Teufel_ASM_Label1J: Top Overlay "ASM REV '.ASM_Rev'" at 13.45,18.9 h1.5
Teufel_Copyright1K: Bottom Overlay "Copyright © '.Copyright_Year' Lautsprecher Teufel GmbH" at 20.315,16.987 h1.5
Teufel_PCB_Label1J: Top Overlay "PCB REV '.PCB_Rev'" at 0.302,18.827 h1.5